# Altium PCB EDR.PcbDoc (part 1 of 2)
Units mm, origin at the board's own origin, x right, y up, seen from the top; angles counter-clockwise.
Board outline 99.5 x 72 mm, 2 copper layers (Top Layer, Bottom Layer); 162 components, 102 nets, 587 pads, 403 vias.
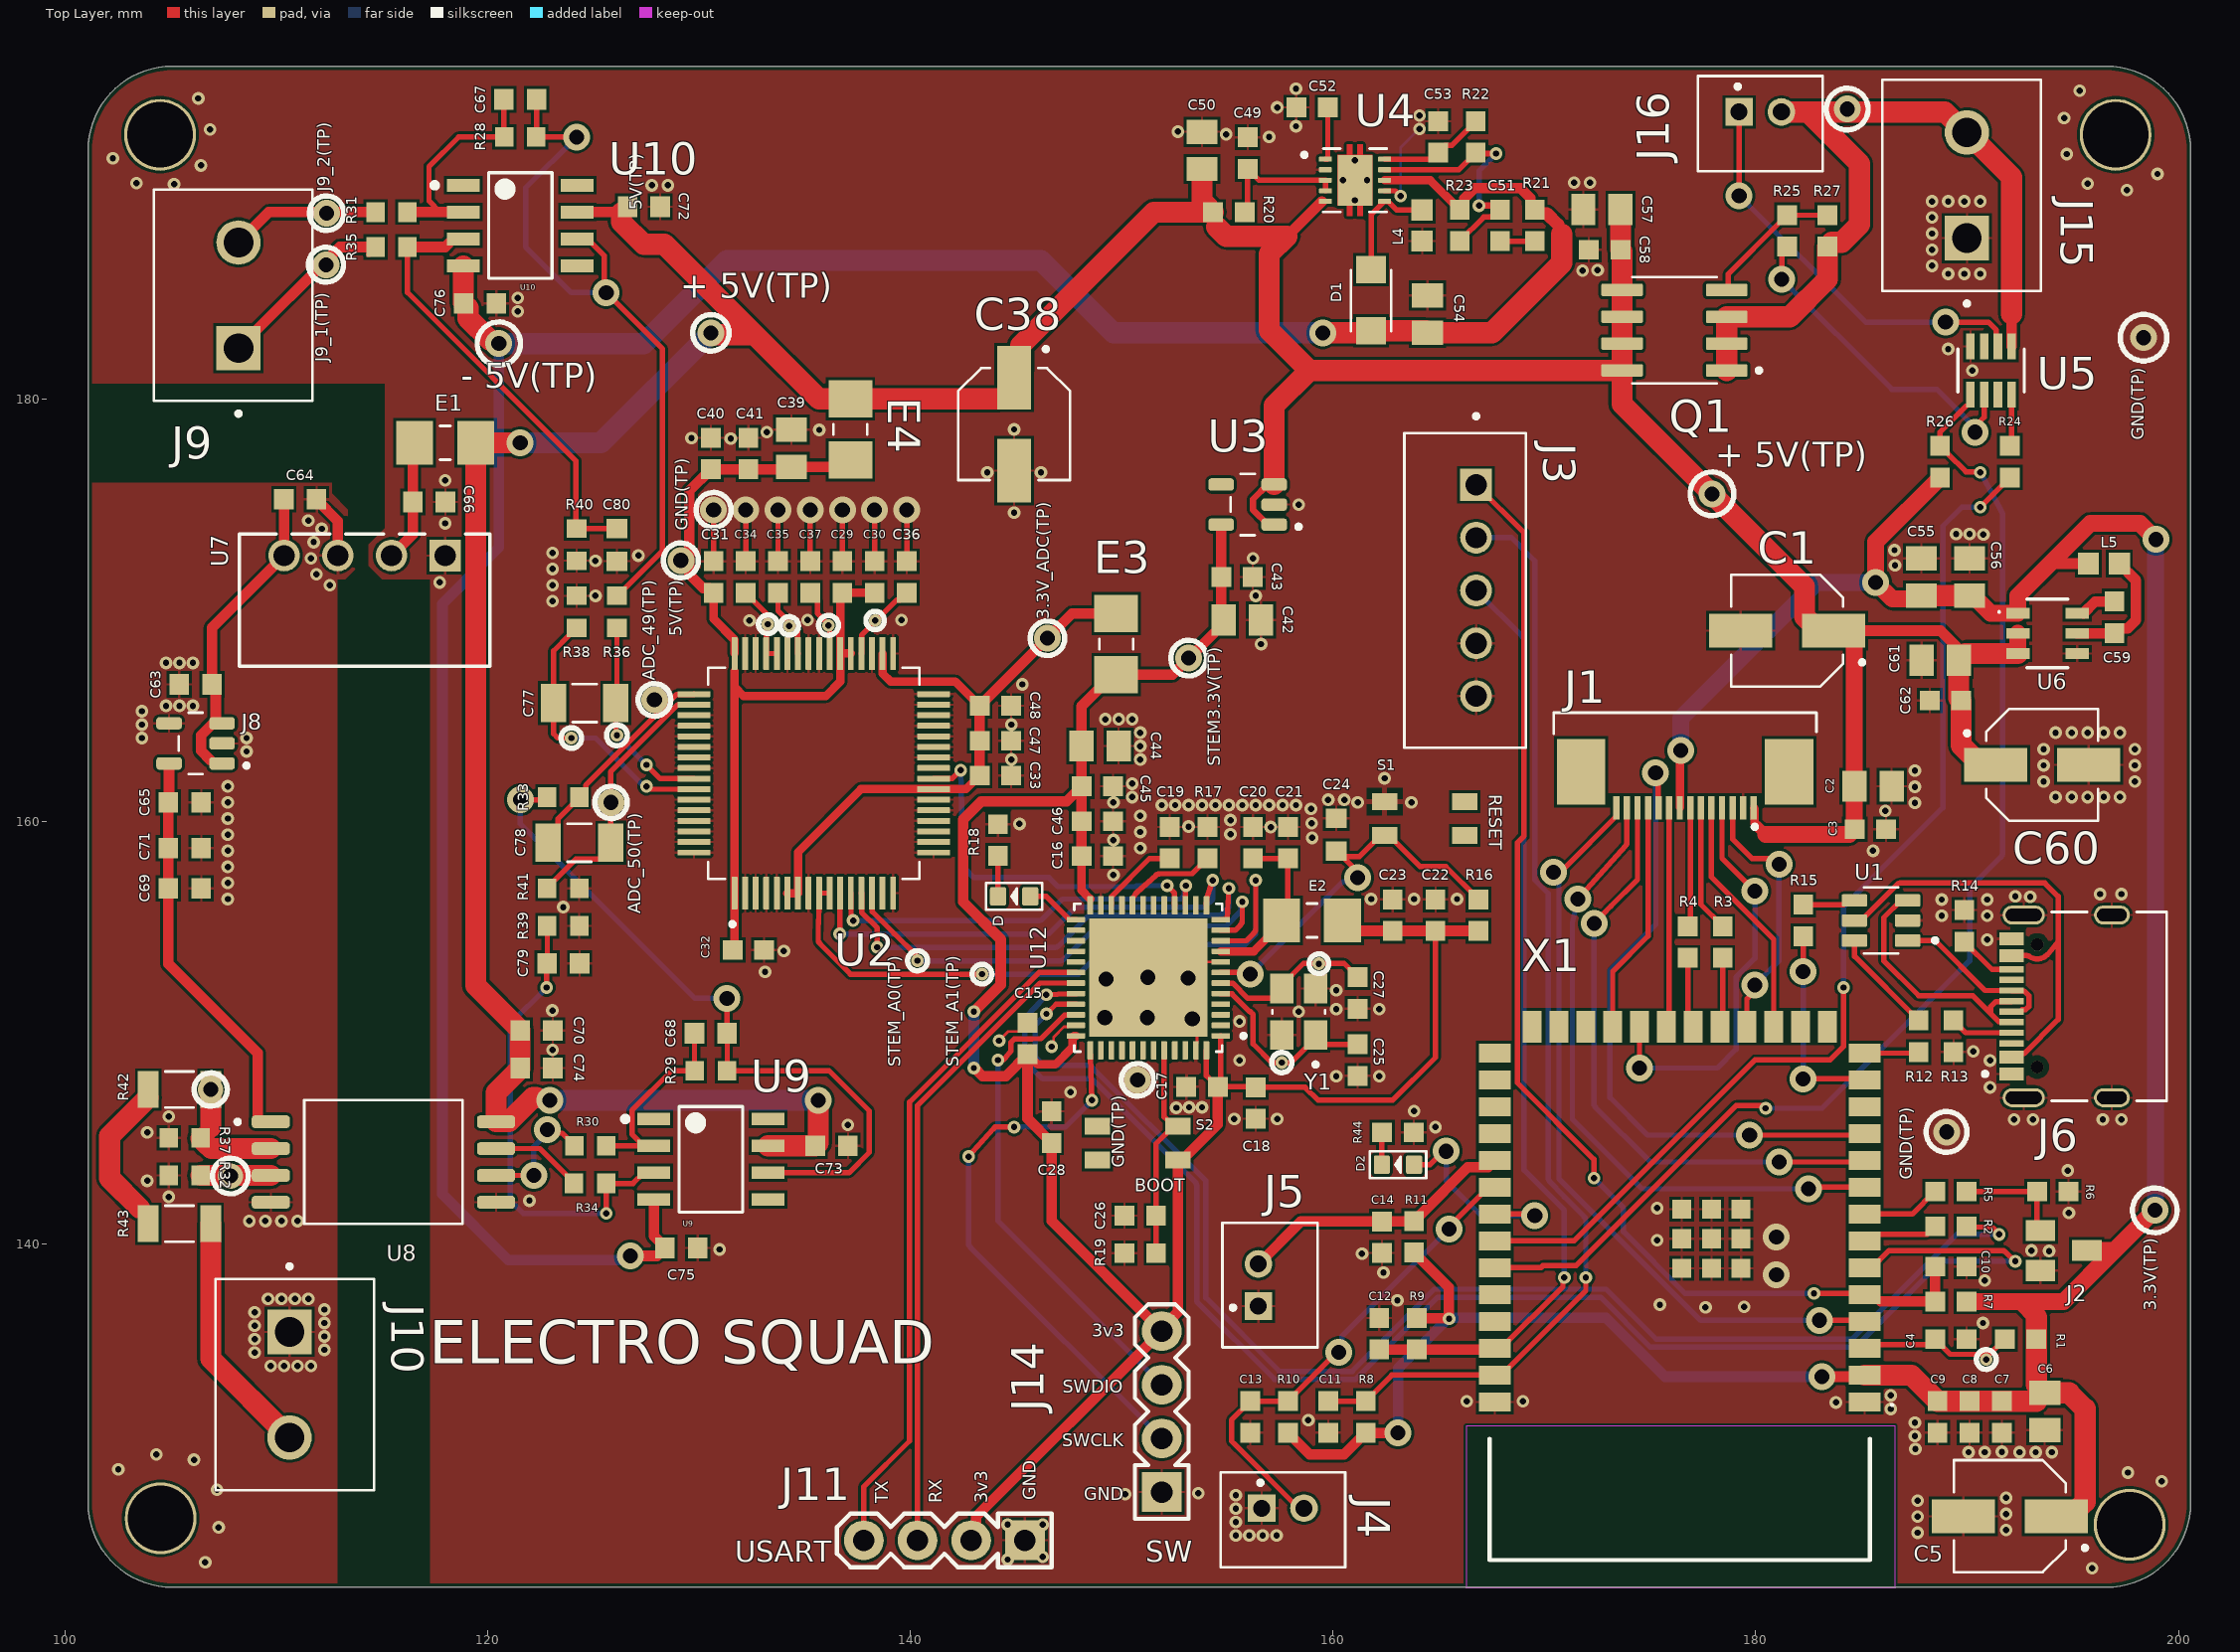
[diagram p0: Top Layer view]
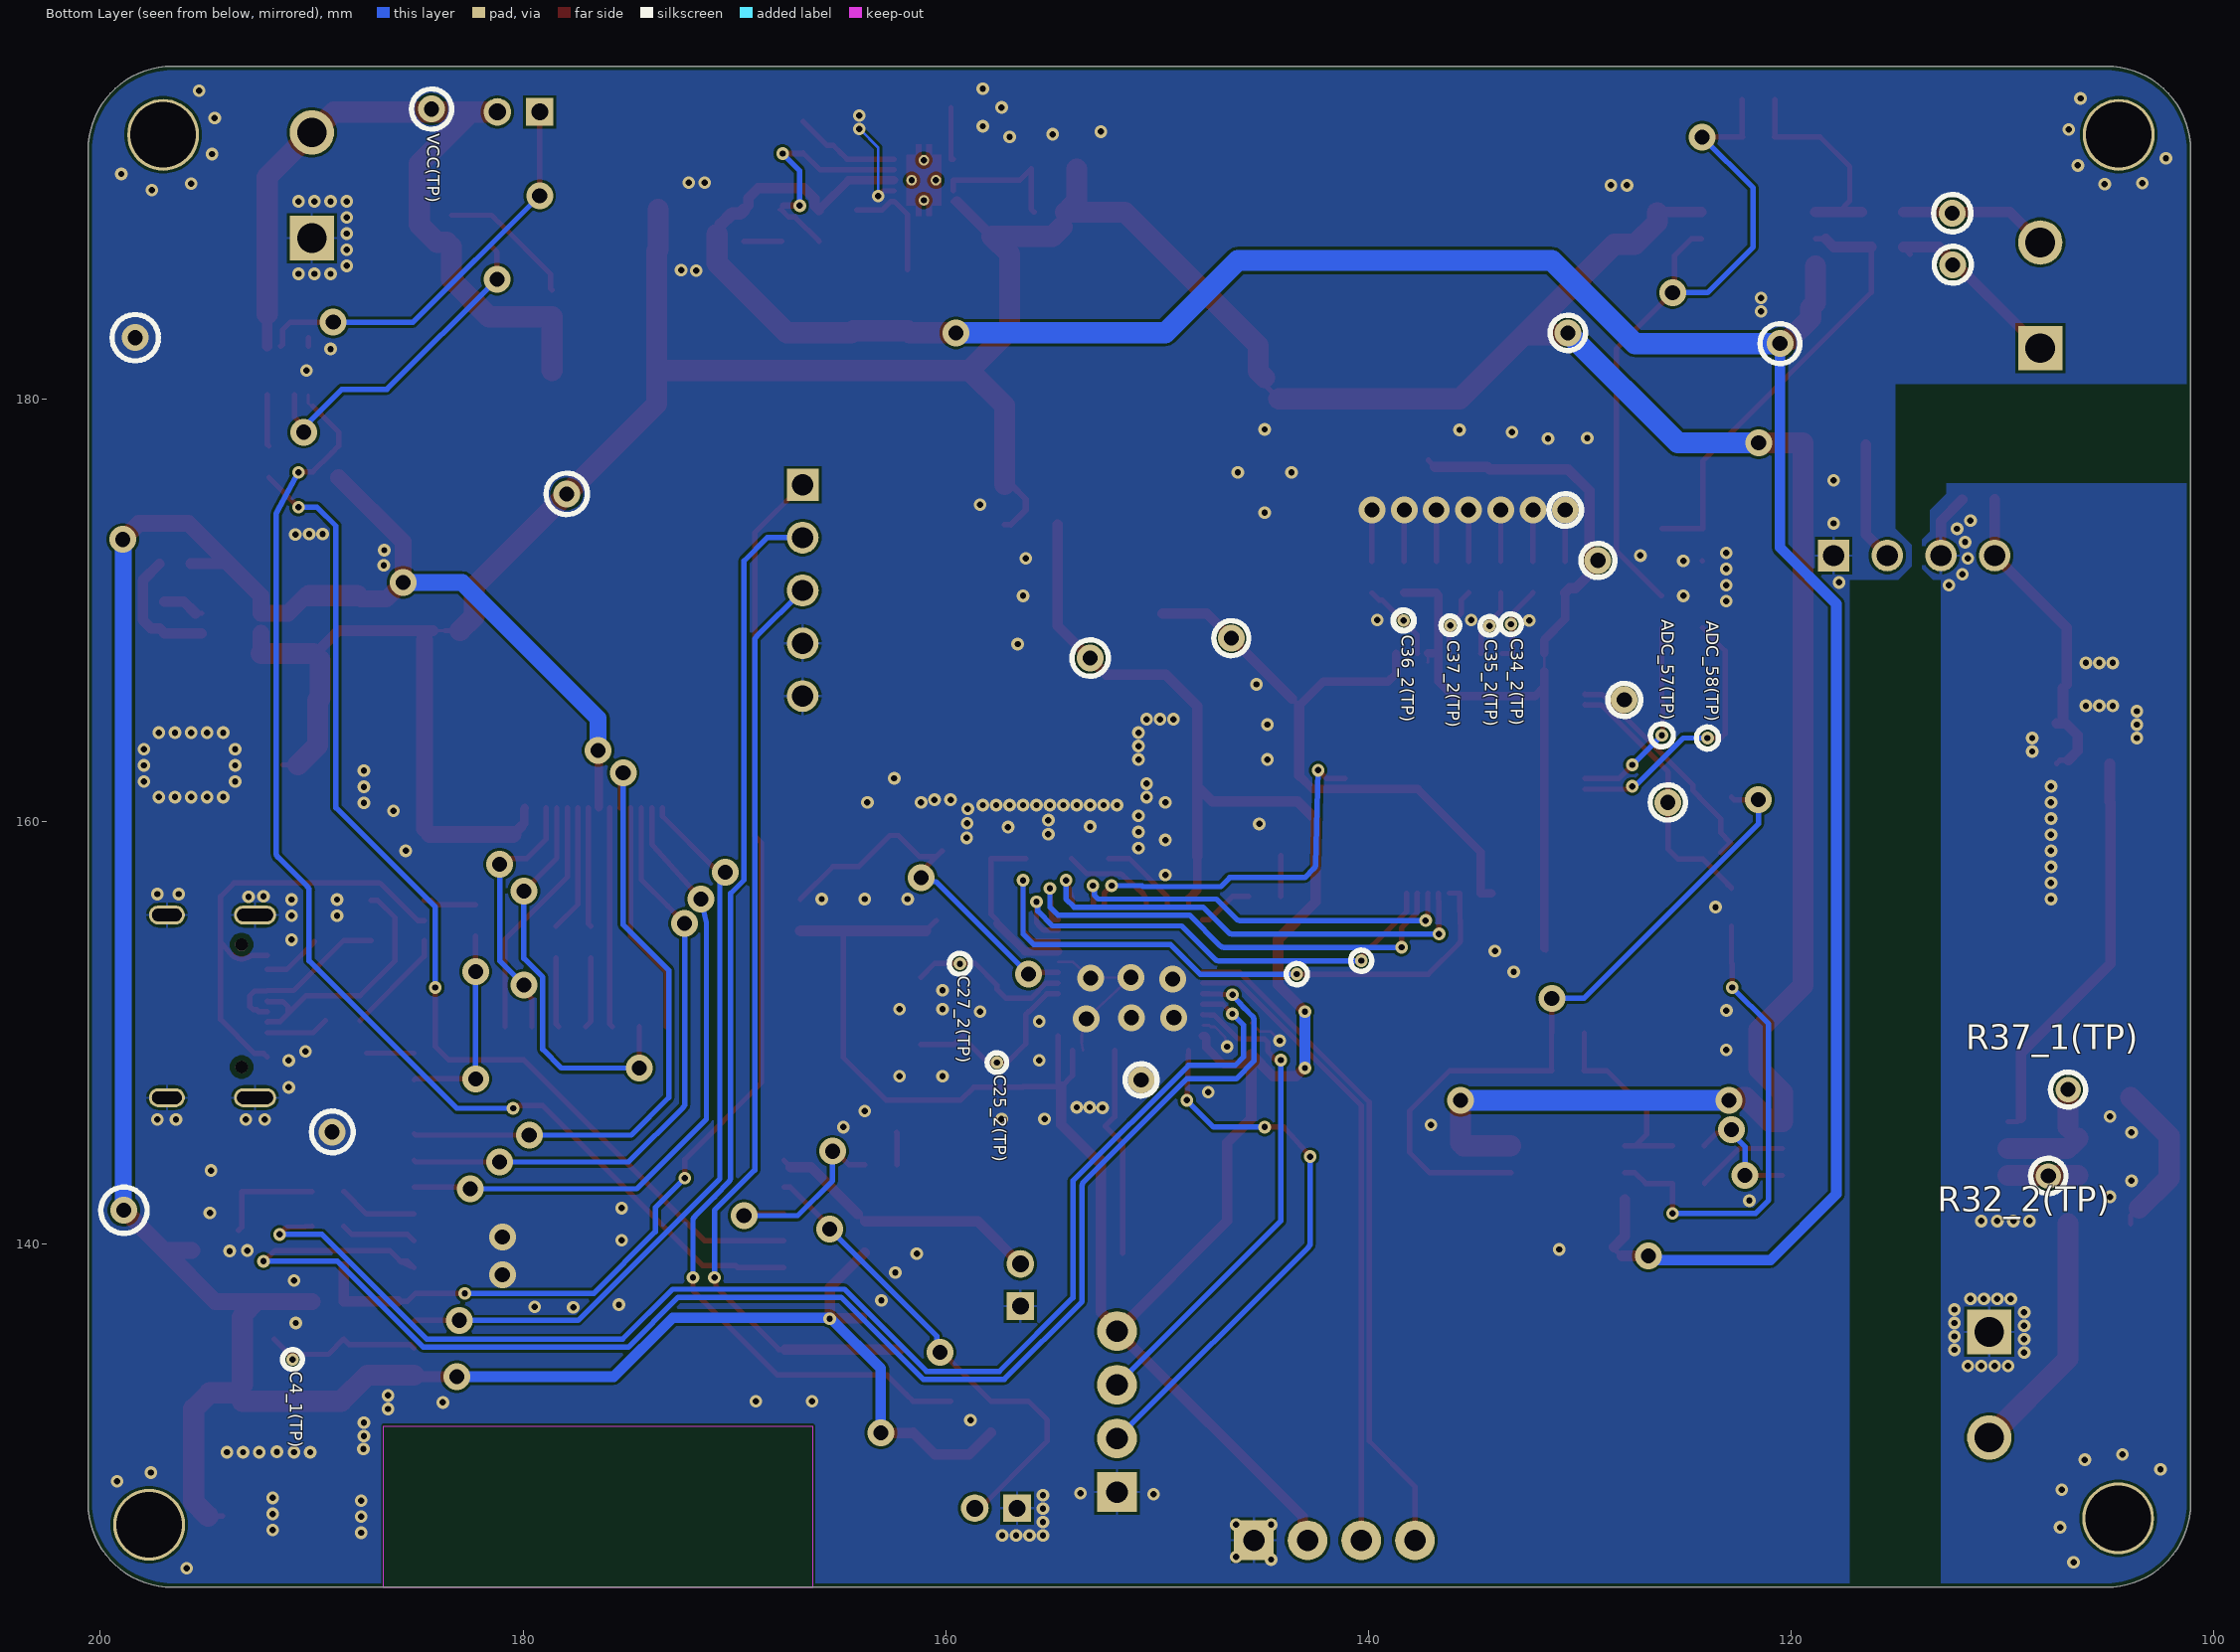
[diagram p1: Bottom Layer view, seen from below]
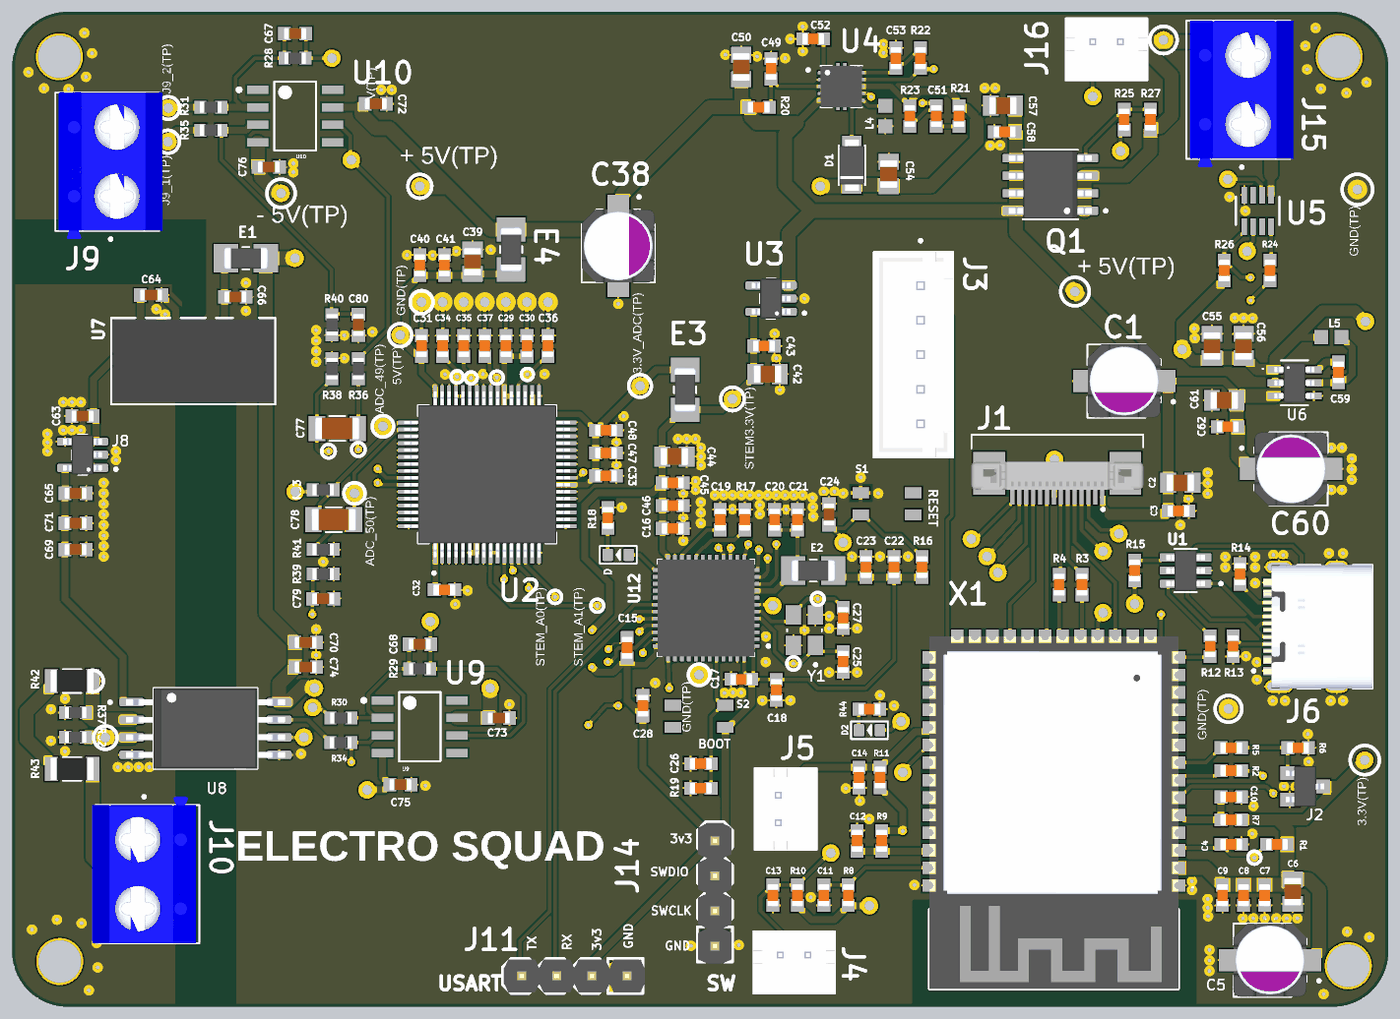
[diagram p3: 3D render of the assembled board from above, using the file's embedded part models]

## Layer stack, top to bottom
Top Solder: solder mask 0.0102, Solder Resist, Dk 3.5
Top Layer: signal copper 0.0356
Dielectric 1: dielectric 0.32, FR-4, Dk 4.8
Bottom Layer: signal copper 0.0356
Bottom Solder: solder mask 0.0102, Solder Resist, Dk 3.5

## Board outline
101.083,127.759 101.083,191.759 cw(c105.083,191.759) 105.083,195.759 196.583,195.759 cw(c196.583,191.759) 200.583,191.759 200.583,127.759 cw(c196.583,127.759) 196.583,123.759 105.083,123.759 cw(c105.083,127.759)

## Design rules (kind name [scope] priority, off if disabled: settings)
AssemblyTestPointUsage [All] p1: allowmultiple=TRUE
AssemblyTestpoint [(IsVia) Or (IsPad And OnMultiLayer)] p1: testpointundercomponent=TRUE minsize=0.5 maxsize=2.54 preferedsize=1.524 minholesize=0 maxholesize=1.016 preferedholesize=0.813 testpointgrid=0.025 usegrid=FALSE gridtolerance=0 allowsidetop=TRUE allowsidebottom=TRUE
BoardOutlineClearance [All] p1: gap=0.2 ignorepadtopadclearanceinfootprint=FALSE
Clearance [All] p1: gap=0.127 ignorepadtopadclearanceinfootprint=FALSE except(0.25: Arc-Hole Track-Hole SMDPad-Hole THPad-Hole Via-Hole Fill-Hole Poly-Hole Region-Hole Text-Hole)
ComponentClearance [All] p1: gap=0.127 collisioncheckmode=3 verticalgap=0.127 showdistances=TRUE
DiffPairsRouting [All] p1: maxlimit=0.254 minlimit=0.127 mostfreqgap=0.127 toplayer_minwidth=0.127 toplayer_maxwidth=25.4 toplayer_prefwidth=0.127 bottomlayer_minwidth=0.127 bottomlayer_maxwidth=25.4 bottomlayer_prefwidth=0.127 maxuncoupledlength=12.7
FabricationTestPointUsage [All] p1: valid=0 allowmultiple=TRUE
FabricationTestpoint [(IsVia) Or (IsPad And OnMultiLayer)] p1: side=3 testpointundercomponent=TRUE minsize=0.5 maxsize=2.54 preferedsize=1.524 minholesize=0 maxholesize=1.016 preferedholesize=0.813 testpointgrid=0.025 allowsidetop=TRUE allowsidebottom=TRUE usegrid=FALSE gridtolerance=0
Height [All] p1: minheight=0 maxheight=1816.048 prefheight=12.7
HoleSize [All] p1: absolutevalues=TRUE maxlimit=6.3 minlimit=0.3 maxpercent=80.000 minpercent=20.000
HoleToHoleClearance [All] p1: gap=0.25 allowstackedmicrovias=FALSE
MinimumAnnularRing [All] p1: minimumring=0.076
MinimumSolderMaskSliver [All] p1: minsoldermaskwidth=0
PlaneClearance [All] p1: clearance=0.127
PlaneConnect PlaneConnectPowerPads [InPadClass('PowerPads')] p1: planeconnectstyle=Direct reliefexpansion=0.508 reliefentries=4 reliefconductorwidth=0.254 reliefairgap=0.254
PlaneConnect [All] p2: pad.planeconnectstyle=Relief pad.reliefexpansion=0.3 pad.reliefentries=4 pad.reliefconductorwidth=0.127 pad.reliefairgap=0.127 via.planeconnectstyle=Direct via.reliefexpansion=0.3 via.reliefentries=4 via.reliefconductorwidth=0.127 via.reliefairgap=0.127
PolygonConnect PolygonConnectPowerPads [All vs (InPadClass('PowerPads'))] p1: connectstyle=Direct reliefconductorwidth=0.254 reliefentries=4 polygonreliefangle="90 Angle" airgapwidth=0.254
PolygonConnect [All] p2: thpad.connectstyle=Relief thpad.reliefconductorwidth=0.127 thpad.reliefentries=4 thpad.polygonreliefangle="90 Angle" thpad.airgapwidth=0.127 smdpad.connectstyle=Relief smdpad.reliefconductorwidth=0.127 smdpad.reliefentries=4 smdpad.polygonreliefangle="90 Angle" smdpad.airgapwidth=0.127 via.connectstyle=Direct via.reliefconductorwidth=0.127 via.reliefentries=4 via.polygonreliefangle="90 Angle" via.airgapwidth=0.127
RoutingVias [All] p1: holewidth=0.3 width=0.6 viastyle="Through Hole" minholewidth=0.3 minwidth=0.6 maxholewidth=0.6 maxwidth=6.6
SilkToSilkClearance [All] p1: silktosilkclearance=0
SilkToSolderMaskClearance [IsPad] p1: minsilkscreentomaskgap=0.127 clearancetoexposedcopper=TRUE
SolderMaskExpansion [All] p1: expansion=0.075 istentingtop=FALSE
Width [All] p1: maxlimit=25.4 minlimit=0.127 preferedwidth=0.127 minimp=50.000000 maximp=50.000000 favimp=50.000000
16 further rules are at their usual default settings.

## Classes and differential pairs
component class U_STM32: C15 C16 C17 C18 C19 C20 C21 C22 C23 C24 C25 C26 C27 C28 D E2 J11 J14 R16 R17 R18 R19 S1 S2 U12 Y1
component class U_Sheet1: C63 C64 C65 C66 C67 C68 C69 C70 C71 C72 C73 C74 C75 C76 C77 C78 C79 C80 E1 J8 J9 J10 R28 R29 R30 R31 R32 R33 R34 R35 R36 R37 R38 R39 R40 R41 R42 R43 U7 U8 U9 U10
component class U_PowerSupply: C38 C39 C40 C41 C42 C43 C44 C45 C46 C47 C48 C49 C50 C51 C52 C53 C54 C55 C56 C57 C58 C59 C60 C61 C62 D1 E3 E4 J15 J16 L4 L5 Q1 R20 R21 R22 R23 R24 R25 R26 R27 U3 U4 U5 U6
component class U_ESP32: C1 C2 C3 C4 C5 C6 C7 C8 C9 C10 C11 C12 C13 C14 D2 J1 J2 J3 J4 J5 J6 R1 R2 R3 R4 R5 R6 R7 R8 R9 R10 R11 R12 R13 R14 R15 R44 U1 X1
component class U_ADS8588: C29 C30 C31 C32 C33 C34 C35 C36 C37 U2

## Components (designator, comment, footprint, x,y, rotation, side; value= is the part's Value field where it differs from the comment)
C1 "100 uF" "100 uF" 181.483,169.037 r180 top
C2 "C2012X7R1H104K085AA" CAPC2012X100N 185.547,161.671 r180 top
C3 "CAP603" CAP603 185.42,159.639 r0 top
C4 "CAP603" CAP603 189.23,135.509 r0 top
C5 "100 uF" "100 uF" 192.024,127.127 r180 top
C6 "C2012X7R1H104K085AA" CAPC2012X100N 193.675,132.08 r90 top
C7 "CAP603" CAP603 191.643,131.826 r90 top
C8 "CAP603" CAP603 190.119,131.826 r90 top
C9 "CAP603" CAP603 188.595,131.826 r90 top
C10 "CAP603" CAP603 189.23,138.938 r0 top
C11 "CAP603" CAP603 159.766,131.826 r270 top
C12 "CAP603" CAP603 162.179,135.763 r90 top
C13 "CAP603" CAP603 156.083,131.826 r90 top
C14 "CAP603" CAP603 162.306,140.335 r90 top
C15 "CAP603" CAP603 145.542,149.733 r90 top
C16 "CAP603" CAP603 148.844,158.369 r0 top
C17 "CAP603" CAP603 153.797,147.447 r180 top
C18 "CAP603" CAP603 156.337,146.685 r270 top
C19 "CAP603" CAP603 152.273,159.004 r90 top
C20 "CAP603" CAP603 156.21,159.004 r270 top
C21 "CAP603" CAP603 157.861,159.004 r270 top
C22 "CAP603" CAP603 164.846,155.575 r270 top
C23 "CAP603" CAP603 162.814,155.575 r270 top
C24 "0.1u" 0603CAPACITOR 160.147,159.385 r270 top
C25 "CAP603" CAP603 161.163,148.717 r90 top
C26 "CAP603" CAP603 150.876,141.351 r0 top
C27 "CAP603" CAP603 161.163,151.892 r90 top
C28 "CAP603" CAP603 146.685,145.542 r90 top
C29 "CAP603" CAP603 136.779,171.577 r90 top
C30 "CAP603" CAP603 138.303,171.577 r90 top
C31 "CAP603" CAP603 130.683,171.577 r90 top
C32 "CAP603" CAP603 132.334,153.924 r0 top
C33 "CAP603" CAP603 144.018,162.179 r0 top
C34 "CAP603" CAP603 132.207,171.577 r270 top
C35 "CAP603" CAP603 133.731,171.577 r270 top
C36 "CAP603" CAP603 139.827,171.577 r270 top
C37 "CAP603" CAP603 135.255,171.577 r270 top
C38 "100 uF" "100 uF" 144.907,178.816 r270 top
C39 "C2012X7R1H104K085AA" CAPC2012X100N 134.366,177.673 r270 top
C40 "CAP603" CAP603 130.556,177.419 r270 top
C41 "CAP603" CAP603 132.334,177.419 r270 top
C42 "C2012X7R1H104K085AA" CAPC2012X100N 155.702,169.545 r180 top
C43 "CAP603" CAP603 155.448,171.577 r180 top
C44 "C2012X7R1H104K085AA" CAPC2012X100N 148.971,163.576 r180 top
C45 "CAP603" CAP603 148.844,161.671 r180 top
C46 "CAP603" CAP603 148.844,160.02 r180 top
C47 "CAP603" CAP603 144.018,163.83 r180 top
C48 "CAP603" CAP603 144.018,165.481 r180 top
C49 "CAP603" CAP603 155.956,191.643 r90 top
C50 "C2012X7R1H104K085AA" CAPC2012X100N 153.797,191.77 r90 top
C51 "CAP603" CAP603 167.894,188.214 r270 top
C52 "CAP603" CAP603 159.004,193.802 r180 top
C53 "CAP603" CAP603 164.973,192.405 r270 top
C54 "C2012X7R1H104K085AA" CAPC2012X100N 164.465,184.023 r270 top
C55 "C2012X7R1H104K085AA" CAPC2012X100N 187.833,171.577 r90 top
C56 "C2012X7R1H104K085AA" CAPC2012X100N 190.119,171.577 r90 top
C57 "C2012X7R1H104K085AA" CAPC2012X100N 172.72,188.976 r0 top
C58 "CAP603" CAP603 172.847,187.071 r0 top
C59 "CAP603" CAP603 196.977,169.672 r90 top
C60 "100 uF" "100 uF" 193.548,162.687 r0 top
C61 "C2012X7R1H104K085AA" CAPC2012X100N 188.722,167.64 r0 top
C62 "CAP603" CAP603 188.976,165.735 r0 top
C63 "1u" 0603CAPACITOR 106.172,166.497 r0 top
C64 "10u" 0603CAPACITOR 111.125,175.26 r0 top
C65 "1u" 0603CAPACITOR 105.664,160.909 r180 top
C66 "4.7u" 0603CAPACITOR 117.221,175.133 r0 top
C67 "1.5n" 0603CAPACITOR 121.539,194.183 r0 top
C68 "2.2n" 0603CAPACITOR 130.556,149.987 r0 top
C69 "0.1u" 0603CAPACITOR 105.664,156.845 r180 top
C70 "1u" 0603CAPACITOR 122.301,150.114 r0 top
C71 "1u" 0603CAPACITOR 105.664,158.75 r180 top
C72 "0.1u" 0603CAPACITOR 127.381,189.103 r0 top
C73 "0.1u" 0603CAPACITOR 136.271,144.653 r0 top
C74 "0.1u" 0603CAPACITOR 122.301,148.336 r0 top
C75 "0.1u" 0603CAPACITOR 129.159,139.827 r0 top
C76 "0.1u" 0603CAPACITOR 119.634,184.531 r0 top
C77 "33n" CAPC1206 124.587,165.608 r0 top locked
C78 "33n" CAPC1206 124.333,159.004 r180 top locked
C79 "2.2n" 0603CAPACITOR 123.571,153.289 r180 top
C80 "1.5n" 0603CAPACITOR 126.111,173.101 r90 top
D "SMD-LED-YELLOW-WHITE(0603)" LED-0603 144.907,156.464 r180 top
D1 "zenor diode" "zenor diode" 161.798,184.658 r270 top locked
D2 "SMD-LED-YELLOW-WHITE(0603)" LED-0603 163.068,143.764 r180 top
E1 "FB" FB_MI1206K601R-10 117.983,177.927 r180 top
E2 "FB" FB_MI1206K601R-10 159.004,155.321 r0 top locked
E3 "FB" FB_MI1206K601R-10 149.733,168.402 r270 top locked
E4 "FB" FB_MI1206K601R-10 137.16,178.562 r90 top locked
J1 "FPC-connector" FPC-connector 176.653,160.655 r180 top
J2 "AO3400" AO3400 194.564,139.7 r270 top
J3 "5-pin jst" "5-pin jst" 166.243,170.942 r90 top locked
J4 "2-pin jst" "2-PIN JST" 157.623,126.958 r180 top
J5 "2-pin jst" "2-PIN JST" 157.014,138.065 r270 top locked
J6 "TYPE-C-31-M-12" TYPE-C-31-M-12 196.85,151.257 r90 top
J8 "TLV70233DBVR" TLV70233 106.172,163.703 r180 top
J9 "KF301-2P" HANDSON_KF301-2P 108.204,184.912 r90 top locked
J10 "KF301-2P" HANDSON_KF301-2P 110.617,133.35 r270 top
J11 "4-pin header" "4-pin header" 142.875,125.984 r180 top locked
J14 "4-pin header" "4-pin header" 151.892,130.81 r90 top locked
J15 "KF301-2P" HANDSON_KF301-2P 189.992,190.119 r90 top
J16 "2-pin jst" "2-PIN JST" 180.213,193.04 r180 top locked
L4 "inductor" inductor 164.211,188.214 r270 top locked
L5 "inductor" inductor 196.469,172.212 r0 top
Q1 "AO4407A" AO4407A 176.149,183.261 r180 top
R1 "RES-603" CAP603 192.532,135.509 r0 top
R2 "RES-603" CAP603 189.23,140.843 r180 top
R3 "RES-603" CAP603 178.435,154.305 r270 top
R4 "RES-603" CAP603 176.784,154.305 r270 top
R5 "RES-603" CAP603 189.23,142.494 r180 top
R6 "RES-603" CAP603 194.056,142.494 r180 top
R7 "RES-603" CAP603 189.23,137.287 r0 top
R8 "RES-603" CAP603 161.544,131.826 r270 top
R9 "RES-603" CAP603 163.957,135.763 r90 top
R10 "RES-603" CAP603 157.861,131.826 r90 top
R11 "RES-603" CAP603 163.83,140.352 r90 top
R12 "RES-603" CAP603 187.706,149.843 r90 top
R13 "RES-603" CAP603 189.357,149.843 r270 top
R14 "RES-603" CAP603 189.865,155.067 r270 top
R15 "RES-603" CAP603 182.245,155.321 r90 top
R16 "RES-603" CAP603 166.878,155.575 r270 top
R17 "RES-603" CAP603 154.051,159.004 r90 top
R18 "RES-603" CAP603 144.145,159.131 r90 top
R19 "RES-603" CAP603 150.876,139.573 r0 top
R20 "RES-603" CAP603 155.067,188.849 r0 top
R21 "RES-603" CAP603 169.545,188.214 r90 top
R22 "RES-603" CAP603 166.751,192.405 r270 top
R23 "RES-603" CAP603 165.989,188.214 r90 top
R24 "RES-603" CAP603 192.024,177.038 r270 top
R25 "RES-603" CAP603 181.483,187.96 r90 top
R26 "RES-603" CAP603 188.722,177.038 r90 top
R27 "RES-603" CAP603 183.388,187.96 r270 top
R28 "33k" 0603RESISTOR 121.539,192.405 r0 top
R29 "22k" 0603RESISTOR 130.556,148.209 r0 top
R30 "10k" 0603RESISTOR 124.848,144.653 r0 top
R31 "10k" 0603RESISTOR 115.443,188.849 r0 top
R32 "1.2k" 0603RESISTOR 105.664,143.256 r0 top
R33 "680R" 0603RESISTOR 123.571,161.163 r0 top
R34 "10k" 0603RESISTOR 124.841,142.875 r0 top
R35 "10k" 0603RESISTOR 115.443,187.198 r0 top
R36 "680R" 0603RESISTOR 126.111,169.933 r270 top
R37 "1.2k" 0603RESISTOR 105.664,145.034 r180 top
R38 "680R" 0603RESISTOR 124.206,169.933 r270 top
R39 "22k" 0603RESISTOR 123.571,155.067 r180 top
R40 "33k" 0603RESISTOR 124.206,173.108 r90 top
R41 "680R" 0603RESISTOR 123.571,156.845 r180 top
R42 "1M" 1M_1206 105.41,147.32 r0 top
R43 "1M" 1M_1206 105.41,140.97 r180 top
R44 "RES-603" CAP603 163.068,145.288 r180 top
S1 "PB" PUSH_BUTTON 164.338,160.147 r0 top
S2 "PB" PUSH_BUTTON 150.749,144.78 r180 top
U1 "USBLC6-2SC6" USBLC6-2SC6 185.928,155.321 r180 top
U2 "ADS8588SIPM" ADS8588SIPM 135.427,162.286 r90 top
U3 "TLV75533PDBVR" TLV75533PDBVR 155.956,175.006 r180 top
U4 "TPS63700DRCR" TPS63700DRCR 161.033,190.357 r0 top
U5 "LTC2954CTS8-1#TRMPBF" LTC2954CTS8-1#TRMPBF 191.135,181.356 r270 top
U6 "AP63203WU-7" AP63203WU-7 193.802,168.91 r0 top
U7 "B0505S-1WR3" B0505S 117.983,172.593 r180 top locked
U8 "AMC1301DWVR" AMC1301 115.062,143.891 r0 top
U9 "OPA197IDR" D0008A-MFG 130.556,144.018 r0 top
U10 "OPA197IDR" D0008A-MFG 121.539,188.214 r0 top
U12 "STM32F411CEU6TR" STM32F411CEU6TR 151.256,152.61 r180 top
X1 "ESP32-S3-WROOM-1-N16R8" ESP32S3WROOM1N8R2 176.403,137.795 r180 top
Y1 "25 MHz oscillator" "25 MHz oscillator" 158.369,151.003 r90 top locked

## Footprints (in the part's own frame and the unit in brackets; to place one, negate y for a bottom-side part, rotate by r counter-clockwise, add the part's x,y. Pads: shape width x height; smd on the part's side, far side on the other; paste and mask are expansions set on the pad)
1M_1206 [mm]
  rect 0.97x1.73 smd paste+0 mask+0.102: 1(-1.48,0) 2(1.48,0)
  silkscreen extent -0.67,-0.85 0.67,0.85, body extent -1.55,-0.8 1.55,0.8, height 0.65
"2-PIN JST" [mm]
  rect 1.308x1.308 / inner round 1.308 / far side rect 1.308x1.308 hole 0.8: 1(1,-0.55)
  round 1.308 hole 0.8: 2(-1,-0.55)
  silkscreen extent -2.95,-2.25 2.95,2.25, body extent -2.95,-2.25 2.95,2.25, height 6
"4-pin header" [mil]
  rect 74x74 / inner round 74 / far side rect 74x74 hole 40 mask+4.02: 1(-100,0)
  round 74 hole 40 mask+4.02: 2(0,0) 3(100,0) 4(200,0)
  silkscreen extent -150,-50 250,50, body extent -155,-47 245,47, height 330
"5-pin jst" [mm]
  rect 1.508x1.508 / inner round 1.508 / far side rect 1.508x1.508 hole 1: 1(5,-0.525)
  round 1.508 hole 1: 2(2.5,-0.525) 3(0,-0.525) 4(-2.5,-0.525) 5(-5,-0.525)
  silkscreen extent -7.45,-2.87 8.35,2.88, body extent -7.45,-2.88 7.45,2.88, height 7
"25 MHz oscillator" [mm]
  rect 1.4x1.1 smd paste+0 mask+0.102: 1(-1.1,-0.8) 2(1.1,-0.8) 3(1.1,0.8) 4(-1.1,0.8)
  silkscreen extent -2.6,-1.25 0.08,1.25
"100 uF" [mm]
  rect 3x1.6 smd: 1(-2.2,0) 2(2.2,0)
  silkscreen extent -3.65,-2.65 2.65,2.65, body extent 0,0 0,0
0603CAPACITOR [mm]
  rect 0.92x0.98 smd: 1(-0.775,0) 2(0.775,0)
  body extent -0.8,-0.41 0.8,0.41, height 0.9
0603RESISTOR [mm]
  rect 0.87x0.93 smd: 1(-0.755,0) 2(0.755,0)
  body extent -0.77,-0.4 0.77,0.4, height 0.6
ADS8588SIPM [mm]
  rrect25% 1.57x0.28 smd: 1(-5.67,3.75) 2(-5.67,3.25) 3(-5.67,2.75) 4(-5.67,2.25) 5(-5.67,1.75) 6(-5.67,1.25) 7(-5.67,0.75) 8(-5.67,0.25) 9(-5.67,-0.25) 10(-5.67,-0.75) 11(-5.67,-1.25) 12(-5.67,-1.75) 13(-5.67,-2.25) 14(-5.67,-2.75) 15(-5.67,-3.25) 16(-5.67,-3.75) 33(5.67,-3.75) 34(5.67,-3.25) 35(5.67,-2.75) 36(5.67,-2.25) 37(5.67,-1.75) 38(5.67,-1.25) 39(5.67,-0.75) 40(5.67,-0.25) 41(5.67,0.25) 42(5.67,0.75) 43(5.67,1.25) 44(5.67,1.75) 45(5.67,2.25) 46(5.67,2.75) 47(5.67,3.25) 48(5.67,3.75)
  rrect25% 0.28x1.57 smd: 17(-3.75,-5.67) 18(-3.25,-5.67) 19(-2.75,-5.67) 20(-2.25,-5.67) 21(-1.75,-5.67) 22(-1.25,-5.67) 23(-0.75,-5.67) 24(-0.25,-5.67) 25(0.25,-5.67) 26(0.75,-5.67) 27(1.25,-5.67) 28(1.75,-5.67) 29(2.25,-5.67) 30(2.75,-5.67) 31(3.25,-5.67) 32(3.75,-5.67) 49(3.75,5.67) 50(3.25,5.67) 51(2.75,5.67) 52(2.25,5.67) 53(1.75,5.67) 54(1.25,5.67) 55(0.75,5.67) 56(0.25,5.67) 57(-0.25,5.67) 58(-0.75,5.67) 59(-1.25,5.67) 60(-1.75,5.67) 61(-2.25,5.67) 62(-2.75,5.67) 63(-3.25,5.67) 64(-3.75,5.67)
  silkscreen extent -7.24,-5 5,5, body extent -6,-6 6,6, height 1.6
AMC1301 [mm]
  rrect50% 1.8x0.6 smd: 1(-5.33,1.905) 2(-5.33,0.635) 3(-5.33,-0.635) 4(-5.33,-1.905) 5(5.33,-1.905) 6(5.33,-0.635) 7(5.33,0.635) 8(5.33,1.905)
  silkscreen extent -7,-2.93 3.75,2.93, body extent -5.75,-2.93 5.75,2.93, height 2.8
AO3400 [mm]
  rect 1x1.4 smd paste+0 mask+0.102: 1(-0.95,-1.1) 2(0.95,-1.1) 3(0,1.1)
  body extent -1.45,-1.4 1.45,1.4, height 1.25
AO4407A [mm]
  rrect25% 1.97x0.6 smd: 1(-2.475,1.905) 2(-2.475,0.635) 3(-2.475,-0.635) 4(-2.475,-1.905) 5(2.475,-1.905) 6(2.475,-0.635) 7(2.475,0.635) 8(2.475,1.905)
  silkscreen extent -4.1,-2.52 2,2.52, body extent -3,-2.45 3,2.45, height 1.75
AP63203WU-7 [mil]
  rect 43.5x20 smd paste+0 mask+4.02: 1(-55.25,37.4) 2(-55.25,0) 3(-55.25,-37.4) 4(55.25,-37.4) 5(55.25,0) 6(55.25,37.4)
  silkscreen extent -91,-64 38,64, body extent -57,-57 57,57, height 39
B0505S [mil]
  rect 59x59 hole 39 paste-99999 mask+0: 1(0,0)
  round 59 hole 39 paste-99999 mask+0: 2(100,0) 3(200,0) 4(300,0)
  silkscreen extent -84,-40 384,206, body extent -79,-35 379,201, height 400
CAP603 [mm]
  rect 0.94x0.93 smd paste+0 mask+0.102: 1(-0.745,0) 2(0.745,0)
  body extent -0.8,-0.4 0.8,0.4, height 0.95
CAPC1206 [mm]
  rect 1.2x1.82 smd paste+0 mask+0.102: 1(-1.475,0) 2(1.475,0)
  silkscreen extent -0.57,-0.9 0.57,0.9, body extent -1.6,-0.8 1.6,0.8, height 1.75
CAPC2012X100N [mm]
  rect 1.15x1.47 smd: 1(-0.88,0) 2(0.88,0)
  body extent -1,-0.63 1,0.63, height 1
D0008A-MFG [mm]
  rect 1.55x0.6 smd paste+0 mask+0: 1(-2.7,1.905) 2(-2.7,0.635) 3(-2.7,-0.635) 4(-2.7,-1.905) 5(2.7,-1.905) 6(2.7,-0.635) 7(2.7,0.635) 8(2.7,1.905)
  silkscreen extent -4.17,-2.5 1.5,2.5
ESP32S3WROOM1N8R2 [mm]
  rect 1.5x0.9 smd: 1(-8.75,5.26) 2(-8.75,3.99) 3(-8.75,2.72) 4(-8.75,1.45) 5(-8.75,0.18) 6(-8.75,-1.09) 7(-8.75,-2.36) 8(-8.75,-3.63) 9(-8.75,-4.9) 10(-8.75,-6.17) 11(-8.75,-7.44) 12(-8.75,-8.71) 13(-8.75,-9.98) 14(-8.75,-11.25) 27(8.75,-11.25) 28(8.75,-9.98) 29(8.75,-8.71) 30(8.75,-7.44) 31(8.75,-6.17) 32(8.75,-4.9) 33(8.75,-3.63) 34(8.75,-2.36) 35(8.75,-1.09) 36(8.75,0.18) 37(8.75,1.45) 38(8.75,2.72) 39(8.75,3.99) 40(8.75,5.26)
  rect 0.9x1.5 smd: 15(-6.985,-12.5) 16(-5.715,-12.5) 17(-4.445,-12.5) 18(-3.175,-12.5) 19(-1.905,-12.5) 20(-0.635,-12.5) 21(0.635,-12.5) 22(1.905,-12.5) 23(3.175,-12.5) 24(4.445,-12.5) 25(5.715,-12.5) 26(6.985,-12.5)
  rect 0.9x0.9 smd: 41(-1.5,-2.46) 42(-1.5,-1.06) 43(-2.9,-1.06) 44(-2.9,-2.46) 45(-2.9,-3.86) 46(-1.5,-3.86) 47(-0.1,-3.86) 48(-0.1,-2.46) 49(-0.1,-1.06)
  silkscreen extent -10.1,5.35 9,12.75, body extent -9,-12.75 9,12.75, height 3.25
FB_MI1206K601R-10 [mm]
  rect 1.76x2.06 smd: 1(-1.445,0) 2(1.445,0)
  silkscreen extent -0.25,-0.8 0.25,0.8, body extent -1.6,-0.8 1.6,0.8, height 1.3
FPC-connector [mm]
  rect 0.3x1.1 smd paste+0 mask+0.102: 1(-3.25,0) 2(-2.75,0) 3(-2.25,0) 4(-1.75,0) 5(-1.25,0) 6(-0.75,0) 7(-0.25,0) 8(0.25,0) 9(0.75,0) 10(1.25,0) 11(1.75,0) 12(2.25,0) 13(2.75,0) 14(3.25,0)
  rect 2.3x3.1 smd paste+0 mask+0.102: P1(-4.92,-1.7) P2(4.92,-1.7)
  silkscreen extent -6.21,-4.5 6.22,1, body extent -6.21,-2.52 6.21,-0.47, height 5.1
HANDSON_KF301-2P [mm]
  rect 2.1x2.1 / inner round 2.1 / far side rect 2.1x2.1 hole 1.4: 1(-2.5,0)
  round 2.1 hole 1.4: 2(2.5,0)
  silkscreen extent -5.7,-3.5 5,4, body extent -5.6,-3.75 5,3.75, height 10
inductor [mm]
  rect 1x1.02 smd: 1(-0.735,0) 2(0.735,0)
LED-0603 [mil]
  rrect25% 30x35 smd: NEG(30,0) POS(-30,0)
  silkscreen extent -52,-25 52,25
LTC2954CTS8-1#TRMPBF [mil]
  rect 48x16 smd: 1(-45,38.39) 2(-45,12.8) 3(-45,-12.8) 4(-45,-38.39) 5(45,-38.39) 6(45,-12.8) 7(45,12.8) 8(45,38.39)
  silkscreen extent -40,-62 40,62
PUSH_BUTTON [mm]
  rect 1.2x0.8 smd paste+0 mask+0.102: 1(-1.9,0.8) 2(1.9,0.8) 3(-1.9,-0.8) 4(1.9,-0.8)
STM32F411CEU6TR [mm]
  rrect25% 0.87x0.27 smd: 1(-3.43,2.75) 2(-3.43,2.25) 3(-3.43,1.75) 4(-3.43,1.25) 5(-3.43,0.75) 6(-3.43,0.25) 7(-3.43,-0.25) 8(-3.43,-0.75) 9(-3.43,-1.25) 10(-3.43,-1.75) 11(-3.43,-2.25) 12(-3.43,-2.75) 25(3.43,-2.75) 26(3.43,-2.25) 27(3.43,-1.75) 28(3.43,-1.25) 29(3.43,-0.75) 30(3.43,-0.25) 31(3.43,0.25) 32(3.43,0.75) 33(3.43,1.25) 34(3.43,1.75) 35(3.43,2.25) 36(3.43,2.75)
  rrect25% 0.27x0.87 smd: 13(-2.75,-3.43) 14(-2.25,-3.43) 15(-1.75,-3.43) 16(-1.25,-3.43) 17(-0.75,-3.43) 18(-0.25,-3.43) 19(0.25,-3.43) 20(0.75,-3.43) 21(1.25,-3.43) 22(1.75,-3.43) 23(2.25,-3.43) 24(2.75,-3.43) 37(2.75,3.43) 38(2.25,3.43) 39(1.75,3.43) 40(1.25,3.43) 41(0.75,3.43) 42(0.25,3.43) 43(-0.25,3.43) 44(-0.75,3.43) 45(-1.25,3.43) 46(-1.75,3.43) 47(-2.25,3.43) 48(-2.75,3.43)
  rect 5.6x5.6 smd paste-4: 49(0,0)
  silkscreen extent -4.6,-3.5 3.5,3.5, body extent -3.5,-3.5 3.5,3.5, height 0.6
TLV70233 [mm]
  rrect50% 1.21x0.59 smd: 1(-1.255,0.95) 2(-1.255,0) 3(-1.255,-0.95) 4(1.255,-0.95) 5(1.255,0.95)
  silkscreen extent -2.51,-1.45 0.8,1.45, body extent -1.4,-1.45 1.4,1.45, height 1.45
TLV75533PDBVR [mm]
  rrect50% 1.21x0.59 smd: 1(-1.255,0.95) 2(-1.255,0) 3(-1.255,-0.95) 4(1.255,-0.95) 5(1.255,0.95)
  silkscreen extent -2.51,-1.45 0.8,1.45, body extent -1.4,-1.45 1.4,1.45, height 1.45
TPS63700DRCR [mm]
  rrect25% 0.6x0.24 smd mask+0: 1(-1.4,1) 2(-1.4,0.5) 3(-1.4,0) 4(-1.4,-0.5) 5(-1.4,-1) 6(1.4,-1) 7(1.4,-0.5) 8(1.4,0) 9(1.4,0.5) 10(1.4,1)
  rrect5% 1.65x2.4 smd paste-2 mask+0: 11(0,0)
  round 0.5 hole 0.3 mask+0: 12(0,-0.95) 13(-0.575,0) 14(0.575,0) 15(0,0.95)
  Top Layer region: 0.375,1.2 0.825,1.2 0.825,-1.2 0.375,-1.2 0.375,-1.7 0.125,-1.7 0.125,-1.2 -0.125,-1.2 -0.125,-1.7 -0.375,-1.7 -0.375,-1.2 -0.825,-1.2 -0.825,1.2 -0.375,1.2 -0.375,1.7 -0.125,1.7 -0.125,1.2 0.125,1.2 0.125,1.7 0.375,1.7
  silkscreen extent -2.49,-1.5 1.5,1.5, body extent -1.5,-1.5 1.5,1.5, height 1
TYPE-C-31-M-12 [mm]
  rect 0.6x1.14 smd mask+0.05: A1_B12(-3.2,4.75) A4_B9(-2.4,4.75) B1_A12(3.2,4.75) B4_A9(2.4,4.75)
  rect 0.3x1.14 smd mask+0.05: A5(-1.25,4.75) A6(-0.25,4.75) A7(0.25,4.75) A8(1.25,4.75) B5(1.75,4.75) B6(0.75,4.75) B7(-0.75,4.75) B8(-1.75,4.75)
  oval 0.9x2 hole 0.6 slot 1.7 at 90 deg: S1(-4.325,4.17) S2(4.325,4.17)
  oval 0.9x1.7 hole 0.6 slot 1.4 at 90 deg: S3(-4.325,0) S4(4.325,0)
  round 0.6 hole 0.6 unplated: ""(-2.87,3.531) ""(2.921,3.531)
  silkscreen extent -4.47,-2.6 4.47,6.1, body extent -4.47,-2.6 4.47,5.31, height 3.31
USBLC6-2SC6 [mm]
  rrect25% 1.21x0.59 smd: 1(-1.255,0.95) 2(-1.255,0) 3(-1.255,-0.95) 4(1.255,-0.95) 5(1.255,0) 6(1.255,0.95)
  silkscreen extent -2.66,-1.56 0.81,1.56, body extent -1.4,-1.46 1.4,1.46, height 1.4
"zenor diode" [mm]
  rect 1.3x1.4 smd: A(1.422,0) C(-1.473,0)
  silkscreen extent -1.45,-0.95 1.45,0.95, body extent -1.85,-0.9 1.85,0.9, height 1.08

## Part data
C1 C5 C38 C60: "Capacitor, Polymer Aluminum, Radial, 12mOhm, 100 CAP, 16V, SVPG, Surface Mount", Package=None, Check_prices=https://www.snapeda.com/parts/16SVPG100M/Panasonic/view-part/?ref=eda, MF=Panasonic, MP=16SVPG100M, SnapEDA_Link=https://www.snapeda.com/parts/16SVPG100M/Panasonic/view-part/?ref=snap
C2 C6 C39 C42 C44 C50 C54 C55 C56 C57 C61: "0.1 ÂµF Â±10% 50V Ceramic Capacitor X7R 0805 (2012 Metric)", Package="2012 TDK", Check_prices=https://www.snapeda.com/parts/C2012X7R1H104K085AA/TDK/view-part/?ref=eda, Digi-Key_Part_Number=445-7534-1-ND, MF=TDK, MP=C2012X7R1H104K085AA, Purchase-URL=https://pricing.snapeda.com/search/part/C2012X7R1H104K085AA/?ref=eda, SnapEDA_Link=https://www.snapeda.com/parts/C2012X7R1H104K085AA/TDK/view-part/?ref=snap
C3 C4 C7 C8 C9 C10 C11 C12 C13 C14 C15 C16 C17 C18 C19 C20 C21 C22 C23 C25 C26 C27 C28 C29 C30 C31 C32 C33 C34 C35 C36 C37 C40 C41 C43 C45 C46 C47 C48 C49 C51 C52 C53 C58 C59 C62: "0.1 ÂµF Â±5% 10V Ceramic Capacitor X7R 0603 (1608 Metric)", Package="0603-2 VISHAY", Check_prices=https://www.snapeda.com/parts/VJ0603Y104JXQCW1BC/Vishay/view-part/?ref=eda, MF=Vishay, MP=VJ0603Y104JXQCW1BC, SnapEDA_Link=https://www.snapeda.com/parts/VJ0603Y104JXQCW1BC/Vishay/view-part/?ref=snap
C24 C69 C72 C73 C74 C75 C76: library part 0603_0.1u, "100nf,X7R,50V", Package="1608 AVX", Check_prices=https://www.snapeda.com/parts/0603YC223KAT2A/AVX/view-part/?ref=eda, MF=AVX, MP=0603YC223KAT2A, SnapEDA_Link=https://www.snapeda.com/parts/0603YC223KAT2A/AVX/view-part/?ref=snap
C63 C65 C70 C71: library part 0603_1u, "1uF,X7R,50V", Package="1608 AVX", Check_prices=https://www.snapeda.com/parts/0603YC223KAT2A/AVX/view-part/?ref=eda, MF=AVX, MP=0603YC223KAT2A, SnapEDA_Link=https://www.snapeda.com/parts/0603YC223KAT2A/AVX/view-part/?ref=snap
C64: library part 0603_10u, "10uF,X7R,50V", Package="1608 AVX", Check_prices=https://www.snapeda.com/parts/0603YC223KAT2A/AVX/view-part/?ref=eda, MF=AVX, MP=0603YC223KAT2A, SnapEDA_Link=https://www.snapeda.com/parts/0603YC223KAT2A/AVX/view-part/?ref=snap
C66: library part 0603_4.7u, "4.7uF,X7R,50V", Package="1608 AVX", Check_prices=https://www.snapeda.com/parts/0603YC223KAT2A/AVX/view-part/?ref=eda, MF=AVX, MP=0603YC223KAT2A, SnapEDA_Link=https://www.snapeda.com/parts/0603YC223KAT2A/AVX/view-part/?ref=snap
C67 C80: library part 0603_1.5nf, "1.5nf_C0G_50V", Package="1608 AVX", Check_prices=https://www.snapeda.com/parts/0603YC223KAT2A/AVX/view-part/?ref=eda, MF=AVX, MP=0603YC223KAT2A, SnapEDA_Link=https://www.snapeda.com/parts/0603YC223KAT2A/AVX/view-part/?ref=snap
C68 C79: library part 0603_2.2n, "2.2nF,C0G,50V", Package="1608 AVX", Check_prices=https://www.snapeda.com/parts/0603YC223KAT2A/AVX/view-part/?ref=eda, MF=AVX, MP=0603YC223KAT2A, SnapEDA_Link=https://www.snapeda.com/parts/0603YC223KAT2A/AVX/view-part/?ref=snap
C77 C78: library part 0603_33n, "33nf_C0G_50V", Package="1608 AVX", Check_prices=https://www.snapeda.com/parts/0603YC223KAT2A/AVX/view-part/?ref=eda, MF=AVX, MP=0603YC223KAT2A, SnapEDA_Link=https://www.snapeda.com/parts/0603YC223KAT2A/AVX/view-part/?ref=snap
D D2: "SMD LED Yellow-White", Package=None, Availability=Unavailable, MF=Chengguangxing, MP=ADL-0603W, Price=None, SnapEDA_Link=https://www.snapeda.com/parts/ADL-0603W/Chengguangxing/view-part/106378/?ref=snap
D1: "DO-214AC (SMA), 1250mW, 5%, Zener Diode", Package="SMA-2 Taiwan Semiconductor", Check_prices=https://www.snapeda.com/parts/1SMA4746H/taiwan/view-part/?ref=eda, MF="Taiwan Semiconductor", MP=1SMA4746H, SnapEDA_Link=https://www.snapeda.com/parts/1SMA4746H/taiwan/view-part/?ref=snap
E1 E2 E3 E4: library part MI1206K601R-10, "600 Ohms @ 100 MHz 1 Power, Signal Line Ferrite Bead 1206 (3216 Metric) 1.5A 80mOhm", Package="1206 Laird", Check_prices=https://www.snapeda.com/parts/MI1206K601R-10/Laird-Signal+Integrity+Products/view-part/?ref=eda, MF="Laird-Signal Integrity", MP=MI1206K601R-10, SnapEDA_Link=https://www.snapeda.com/parts/MI1206K601R-10/Laird-Signal+Integrity+Products/view-part/?ref=snap
J1: "14 Position FPC Connector Contacts, Top 0.020 (0.50mm) Surface Mount, Right Angle", Package=None, Check_prices=https://www.snapeda.com/parts/1-1734839-4/TE+Connectivity+AMP+Connectors/view-part/?ref=eda, EU_RoHS_Compliance=Compliant, MF="TE Connectivity", MP=1-1734839-4, SnapEDA_Link=https://www.snapeda.com/parts/1-1734839-4/TE+Connectivity+AMP+Connectors/view-part/?ref=snap
J2: "N-Channel 30 V 5.8A (Ta) 1.4W (Ta) Surface Mount SOT-23-3", Package="SOT-23-3 Alpha &amp; Omega Semiconductor", Check_prices=https://www.snapeda.com/parts/AO3400/Alpha/view-part/?ref=eda, MF="Alpha &", MP=AO3400, SnapEDA_Link=https://www.snapeda.com/parts/AO3400/Alpha/view-part/?ref=snap
J3: "Connector Header Through Hole 5 position 0.098 (2.50mm)", Package=None, Check_prices=https://www.snapeda.com/parts/B5B-XH-A(LF)(SN)/JST+Sales+America+Inc./view-part/?ref=eda, MF="JST Sales America Inc.", MP=B5B-XH-A(LF)(SN), SnapEDA_Link=https://www.snapeda.com/parts/B5B-XH-A(LF)(SN)/JST+Sales+America+Inc./view-part/?ref=snap
J4 J5 J16: "Connector Header Through Hole 2 position 0.079 (2.00mm)", Package=None, Check_prices=https://www.snapeda.com/parts/B2B-PH-K-S/JST/view-part/?ref=eda, MF="JST Sales America Inc.", MP=B2B-PH-K-S, SnapEDA_Link=https://www.snapeda.com/parts/B2B-PH-K-S/JST/view-part/?ref=snap
J6: "USB Connectors 24 Receptacle 1 8.94*7.3mm RoHS", Package=Package, Check_prices=https://www.snapeda.com/parts/TYPE-C-31-M-12/HRO+Electronics+Co.%252C+Ltd./view-part/?ref=eda, MF="HRO Electronics Co., Ltd.", MP=TYPE-C-31-M-12, SnapEDA_Link=https://www.snapeda.com/parts/TYPE-C-31-M-12/HRO+Electronics+Co.%252C+Ltd./view-part/?ref=snap
J8: "300-mA, high-PSRR, low-IQ, low-dropout voltage regulator with enable", Package="SOT-23-5 Texas Instruments", Check_prices=https://www.snapeda.com/parts/TLV70233DBVR/Texas+Instruments/view-part/?ref=eda, MF="Texas Instruments", MP=TLV70233DBVR, SnapEDA_Link=https://www.snapeda.com/parts/TLV70233DBVR/Texas+Instruments/view-part/?ref=snap
J9 J10 J15: "2 Pin Terminal Block 5mm Pitch", Package=None, Check_prices=https://www.snapeda.com/parts/KF301-2P/Handson+Technology/view-part/?ref=eda, MF="Handson Technology", MP=KF301-2P, SnapEDA_Link=https://www.snapeda.com/parts/KF301-2P/Handson+Technology/view-part/?ref=snap
J11 J14: "BergStikÂ®, Board to Board connector, Unshrouded Header, Through Hole, Single Row, 4 Positions, 2.54 mm Pitch, Vertical, 5.84 mm (0.23 in.) Mating, 2.41 mm (0.095 in.) Tail", Package=None, Check_prices=https://www.snapeda.com/parts/68000-104HLF/Amphenol+FCI/view-part/?ref=eda, MF=FCI, MP=68000-104HLF, SnapEDA_Link=https://www.snapeda.com/parts/68000-104HLF/Amphenol+FCI/view-part/?ref=snap
L4 L5: "Inductor with Inductance: 4.7uH Tol. +/-20%, Package: 0603 _1608_", Package="1608 Murata", Availability=Unavailable, MF="Murata Electronics", MP=LQM18PN4R7MFRL, Price=None, SnapEDA_Link=https://www.snapeda.com/parts/LQM18PN4R7MFRL/Murata%20Electronics%20North%20America/view-part/1499515/?ref=snap
Q1: "P-Channel 30 V 12A (Ta) 3.1W (Ta) Surface Mount 8-SOIC", Package="SOIC-8 Alpha &amp; Omega Semiconductor", Check_prices=https://www.snapeda.com/parts/AO4407A/Alpha/view-part/?ref=eda, MF="Alpha &", MP=AO4407A, SnapEDA_Link=https://www.snapeda.com/parts/AO4407A/Alpha/view-part/?ref=snap
R1 R2 R3 R4 R5 R6 R7 R8 R9 R10 R11 R12 R13 R14 R15 R16 R17 R18 R19 R20 R21 R22 R23 R24 R25 R26 R27 R44: Package="2012 Rohm Semiconductor", Availability="In Stock", Check_prices=https://www.snapeda.com/parts/RC0805FR-0710KL/Yageo/view-part/?ref=eda, MF=Yageo, MP=RC0805FR-0710KL, Price=None, Purchase-URL=https://pricing.snapeda.com/search/part/RC0805FR-0710KL/?ref=eda, SnapEDA_Link=https://www.snapeda.com/parts/RC0805FR-0710KL/Yageo/view-part/?ref=snap
R28 R40: library part 0603_33k_1, "33kOhm", Package="1508 Bourns", Check_prices=https://www.snapeda.com/parts/CRT0603-FY-1000ELF/Bourns/view-part/?ref=eda, Digi-Key_Part_Number=118-CRT0603-FY-1000ELFTR-ND, MF=Bourns, MP=CRT0603-FY-1000ELF, Purchase-URL=https://pricing.snapeda.com/search/part/CRT0603-FY-1000ELF/?ref=eda, SnapEDA_Link=https://www.snapeda.com/parts/CRT0603-FY-1000ELF/Bourns/view-part/?ref=snap
R29 R39: library part 0603_22k, "22kOhm_0.1% to 0.5%", Package="1508 Bourns", Check_prices=https://www.snapeda.com/parts/CRT0603-FY-1000ELF/Bourns/view-part/?ref=eda, Digi-Key_Part_Number=118-CRT0603-FY-1000ELFTR-ND, MF=Bourns, MP=CRT0603-FY-1000ELF, Purchase-URL=https://pricing.snapeda.com/search/part/CRT0603-FY-1000ELF/?ref=eda, SnapEDA_Link=https://www.snapeda.com/parts/CRT0603-FY-1000ELF/Bourns/view-part/?ref=snap
R30 R31 R34 R35: library part 0603_10k, "10kOhm", Package="1508 Bourns", Check_prices=https://www.snapeda.com/parts/CRT0603-FY-1000ELF/Bourns/view-part/?ref=eda, Digi-Key_Part_Number=118-CRT0603-FY-1000ELFTR-ND, MF=Bourns, MP=CRT0603-FY-1000ELF, Purchase-URL=https://pricing.snapeda.com/search/part/CRT0603-FY-1000ELF/?ref=eda, SnapEDA_Link=https://www.snapeda.com/parts/CRT0603-FY-1000ELF/Bourns/view-part/?ref=snap
R32 R37: library part 0603_1.2K, "1.2k (0.1%-0.5%)", Package="1508 Bourns", Check_prices=https://www.snapeda.com/parts/CRT0603-FY-1000ELF/Bourns/view-part/?ref=eda, Digi-Key_Part_Number=118-CRT0603-FY-1000ELFTR-ND, MF=Bourns, MP=CRT0603-FY-1000ELF, Purchase-URL=https://pricing.snapeda.com/search/part/CRT0603-FY-1000ELF/?ref=eda, SnapEDA_Link=https://www.snapeda.com/parts/CRT0603-FY-1000ELF/Bourns/view-part/?ref=snap
R33 R36 R38 R41: library part 0603_680Ohm, "680Ohm-0.1%", Package="1508 Bourns", Check_prices=https://www.snapeda.com/parts/CRT0603-FY-1000ELF/Bourns/view-part/?ref=eda, Digi-Key_Part_Number=118-CRT0603-FY-1000ELFTR-ND, MF=Bourns, MP=CRT0603-FY-1000ELF, Purchase-URL=https://pricing.snapeda.com/search/part/CRT0603-FY-1000ELF/?ref=eda, SnapEDA_Link=https://www.snapeda.com/parts/CRT0603-FY-1000ELF/Bourns/view-part/?ref=snap
R42 R43: library part 1206-1M, "1M Ohms Â±1% 0.25W, 1/4W Chip Resistor 1206 (3216 Metric) Moisture Resistant Thick Film", Package="3116 Yageo", Check_prices=https://www.snapeda.com/parts/RC1206JR-0713RL/Yageo/view-part/?ref=eda, MF=Yageo, MP=RC1206JR-0713RL, SnapEDA_Link=https://www.snapeda.com/parts/RC1206JR-0713RL/Yageo/view-part/?ref=snap
S1 S2: library part PushButton
U1: "17V Clamp 5A (8/20Âµs) Ipp Tvs Diode Surface Mount SOT-23-6", Package="SOT-23-6 STMicroelectronics", Availability="In Stock", Check_prices=https://www.snapeda.com/parts/USBLC6-2SC6/STMicroelectronics/view-part/?ref=eda, MF=STMicroelectronics, MP=USBLC6-2SC6, Price=None, Purchase-URL=https://pricing.snapeda.com/search/part/USBLC6-2SC6/?ref=eda, SnapEDA_Link=https://www.snapeda.com/parts/USBLC6-2SC6/STMicroelectronics/view-part/?ref=snap
U2: "16-Bit High-Speed 8-Channel Simultaneous-Sampling ADC With Bipolar Inputs on a Single Supply 64-LQFP -40 to 125", Package="LQFP-64 Texas Instruments", Availability="In Stock", Check_prices=https://www.snapeda.com/parts/ADS8588SIPM/Texas+Instruments/view-part/?ref=eda, MF="Texas Instruments", MP=ADS8588SIPM, Price=None, Purchase-URL=https://pricing.snapeda.com/search/part/ADS8588SIPM/?ref=eda, SnapEDA_Link=https://www.snapeda.com/parts/ADS8588SIPM/Texas+Instruments/view-part/?ref=snap
U3: "500-mA High-PSRR Low-IQ-Tief-Dropout-Spannungsregler mitablem", Package="SOT-23-5 Texas Instruments", Check_prices=https://www.snapeda.com/parts/TLV75533PDBVR/Texas+Instruments/view-part/?ref=eda, MF="Texas Instruments", MP=TLV75533PDBVR, SnapEDA_Link=https://www.snapeda.com/parts/TLV75533PDBVR/Texas+Instruments/view-part/?ref=snap
U4: "Adjustable, -15V Output Inverting DC/DC Converter in 3x3 QFN", Package="VSON-10 Texas Instruments", Check_prices=https://www.snapeda.com/parts/TPS63700DRCR/Texas+Instruments/view-part/?ref=eda, MF="Texas Instruments", MP=TPS63700DRCR, SnapEDA_Link=https://www.snapeda.com/parts/TPS63700DRCR/Texas+Instruments/view-part/?ref=snap
U5: Package=None, Availability=Unavailable, MF="{'manufacturer': u'Analog Devices Inc.'}", MP=LTC2954CTS8-1#TRMPBF, Price=None
U6: "Buck Switching Regulator IC Positive Fixed 3.3V 1 Output 2A SOT-23-6 Thin, TSOT-23-6", Package="SOT-23-6 Diodes Incorporated", Check_prices=https://www.snapeda.com/parts/AP63203WU-7/Diodes+Inc./view-part/?ref=eda, MF="Diodes Zetex", MP=AP63203WU-7, SnapEDA_Link=https://www.snapeda.com/parts/AP63203WU-7/Diodes+Inc./view-part/?ref=snap
U7: "Description", Manufacturer_Name=MORNSUN, Copyright="Copyright (C) 2026 Ultra Librarian. All rights reserved.", Manufacturer_Part_Number=B0505S-1WR3, RefDes=RefDes, Type="DC DC Converters"
U8: "250 mV-Input Precision Reinforced Isolated Amplifier for Current Sensing 8-SOIC -40 to 125", Package="SOIC-8 Texas Instruments", Availability="In Stock", Check_prices=https://www.snapeda.com/parts/AMC1301DWVR/Texas+Instruments/view-part/?ref=eda, MF="Texas Instruments", MP=AMC1301DWVR, Price=None, Purchase-URL=https://pricing.snapeda.com/search/part/AMC1301DWVR/?ref=eda, SnapEDA_Link=https://www.snapeda.com/parts/AMC1301DWVR/Texas+Instruments/view-part/?ref=snap
U9 U10: "Single, 36-V, precision, rail-to-rail input output, low offset voltage op amp 8-SOIC -40 to 125", Manufacturer_Name="Texas Instruments", Copyright="Copyright (C) 2026 Ultra Librarian. All rights reserved.", Manufacturer_Part_Number=OPA197IDR, RefDes=RefDes, Type=TYPE
U12: "ARMÂ® CortexÂ®-M4 series Microcontroller IC 32-Bit Single-Core 100MHz 512KB (512K x 8) FLASH 48-UFQFPN (7x7)", Package="UFQFN-48 STMicroelectronics", Availability="In Stock", Check_prices=https://www.snapeda.com/parts/STM32F411CEU6TR/STMicroelectronics/view-part/?ref=eda, MF=STMicroelectronics, MP=STM32F411CEU6TR, Price=None, Purchase-URL=https://pricing.snapeda.com/search/part/STM32F411CEU6TR/?ref=eda, SnapEDA_Link=https://www.snapeda.com/parts/STM32F411CEU6TR/STMicroelectronics/view-part/?ref=snap
X1: "Bluetooth, WiFi 802.11b/g/n, Bluetooth v5.0 Transceiver Module 2.4GHz PCB Trace Surface Mount", Package="NON STANDARD Espressif Systems", Check_prices=https://www.snapeda.com/parts/ESP32-S3-WROOM-1-N16R8/Espressif+Systems/view-part/?ref=eda, MF="Espressif Systems", MP=ESP32-S3-WROOM-1-N16R8, SnapEDA_Link=https://www.snapeda.com/parts/ESP32-S3-WROOM-1-N16R8/Espressif+Systems/view-part/?ref=snap
Y1: "25 MHz 10ppm Crystal 18pF 30 Ohms 4-SMD, No Lead (3.20mm x 2.50mm)", Package=None, Check_prices=https://www.snapeda.com/parts/RH100-25.000-18-F-1015-TR-NS2/Raltron+Electronics/view-part/?ref=eda, MF="Raltron Electronics", MP=RH100-25.000-18-F-1015-TR-NS2, SnapEDA_Link=https://www.snapeda.com/parts/RH100-25.000-18-F-1015-TR-NS2/Raltron+Electronics/view-part/?ref=snap

## Free pads (board coordinates)
  round 3.4 hole 3.1: 3(104.496,192.507) 3(104.521,127.025) 3(197.028,192.507) 3(197.688,126.721)

## Via types
v1: diameter 0.6, hole 0.3, Top Layer to Bottom Layer, 331 vias
v2: diameter 1.27, hole 0.711, Top Layer to Bottom Layer, 70 vias
v3: diameter 1.2, hole 0.711, Top Layer to Bottom Layer, 2 vias

## Nets (pads, with @x,y where several pads share a name; then routed paths per layer and width w, separated by ;. In a path a pad name is that pad's centre, name@x,y a point inside that pad or via, vN(x,y) a via of type N, cw(c..) or ccw(c..) an arc to the next point about the centre after c; other vN are vias at no path point)
3.3V: C5.1 C6.2 C7.2 C8.2 C9.2 C55.1 C56.1 J1.8 J2.3 L5.1 R1.2 R7.2 R8.2 R9.2 R10.1 R11.1 R26.1 U6.1 X1.2 | length 145.2
  Top Layer w0.127: X1.2@185.079,133.731 X1.2@185.153,133.805
  Top Layer w0.254: R10.1@157.861,131.076 R10.1@157.861,131.081 ; R8.2@161.544,131.076 R8.2@161.544,131.081 R8.2@161.561,131.064 ; R11.1@163.83,139.602 R11.1@163.83,139.607 ; R9.2@163.957,136.508 R9.2@163.974,136.525 ; J1.8@176.403,160.655 J1.8@176.424,160.676 ; v2@176.424,163.343 v2(176.445,163.364) ; C55.1@187.669,170.533 C55.1@187.833,170.697 ; C9.2@188.595,132.571 C9.2@188.595,132.576 ; R26.1@188.722,176.288 R26.1@188.722,176.293 ; C56.1@190.119,170.697 C56.1@190.279,170.697 ; C6.2@193.277,133.358 C6.2@193.675,132.96 C6.2@193.286,132.571 ; C5.1@194.224,127.127 C5.1@194.907,127.127
  Top Layer w0.4: J1.8@176.424,160.676 v2@176.424,163.343
  Top Layer w0.5: R10.1@157.861,131.076 158.889,130.048 160.516,130.048 R8.2@161.544,131.076 ; R8.2@161.561,131.064 v2@162.814,131.064 ; R11.1@163.83,139.602 165.481,137.951 v1@165.481,136.525 ; R9.2@163.974,136.525 164.008,136.491 165.464,136.491 v1@165.481,136.474 ; v2(183.134,133.731) X1.2@185.079,133.731 ; 193.929,172.212 L5.1@195.734,172.212
  Top Layer w0.8: C55.1@187.669,170.533 186.464,170.533 v2(185.674,171.323) 185.674,173.24 R26.1@188.722,176.288 ; R7.2@189.975,137.287 192.532,137.287 ; C56.1@190.279,170.697 191.116,169.86 U6.1@192.399,169.86 192.399,170.682 193.929,172.212 195.834,174.117 198.174,174.117 v2(198.936,173.355) ; 193.277,136.542 192.532,137.287 ; J2.3@195.664,139.7 196.977,139.7 ; v2(198.882,141.605) 196.977,139.7 ; 192.532,137.287 194.564,137.287 196.977,139.7
  Top Layer w1: X1.2@185.153,133.805 187.366,133.805 C9.2@188.595,132.576 ; C55.1@187.833,170.697 C56.1@190.119,170.697 ; C9.2@188.595,132.571 C8.2@190.119,132.571 C7.2@191.643,132.571 C6.2@193.286,132.571 ; C6.2@193.277,133.358 R1.2@193.277,135.509 193.277,136.542 ; C6.2@193.675,132.96 194.827,132.96 195.58,132.207 195.58,127.8 C5.1@194.907,127.127
  Bottom Layer w0.5: v2(163.068,131.064) 163.068,134.112 165.43,136.474 v1@165.481,136.474 ; v1@165.481,136.525 172.91,136.525 175.704,133.731 v2(183.134,133.731)
  Bottom Layer w0.8: v2(176.445,163.364) 176.445,164.888 182.88,171.323 v2(185.674,171.323) ; v2(198.882,141.605) 198.909,141.632 198.909,173.328 v2(198.936,173.355)
  other v1: 165.487,136.473
3.3V_ADC: C33.1 C47.2 C48.2 E3.1 U2.6 U2.7 U2.23 U2.34 | length 30.3
  Top Layer w0.254: U2.34@138.677,167.956 U2.34@138.69,167.943 ; C33.1@143.268,162.179 C33.1@143.273,162.179 ; C48.2@143.268,165.481 C48.2@143.273,165.481 143.278,165.481 143.616,165.819 C48.2@143.616,165.824
  Top Layer w0.4: U2.6@134.177,156.616 U2.7@134.677,156.616 134.677,158.553 137.66,161.536 U2.23@141.097,161.536 142.625,161.536 C33.1@143.268,162.179 ; U2.34@138.69,167.943 138.69,166.999 139.065,166.624 142.125,166.624 C48.2@143.268,165.481
  Top Layer w0.5: C33.1@143.273,162.179 C47.2@143.273,163.83 C48.2@143.273,165.481 ; C48.2@143.616,165.824 147.639,169.847 E3.1@149.733,169.847
  other v2: 146.482,168.681
5V: C29.1 C30.1 C31.1 C32.1 C39.2 C40.2 C41.2 E4.1 U2.1 U2.37 U2.38 U2.48 | length 43.7
  Top Layer w0.127: 131.677,167.113 U2.48@131.677,167.956 ; U2.37@137.177,167.956 137.177,167.547 U2.37@137.185,167.538
  Top Layer w0.254: C31.1@130.34,171.175 130.345,171.175 130.683,170.837 C31.1@130.683,170.832 ; C40.2@130.556,176.669 C40.2@130.556,176.674 ; C32.1@131.589,153.924 C32.1@131.677,154.012 ; C39.2@134.247,176.674 C39.2@134.366,176.793 ; C29.1@136.677,170.73 C29.1@136.779,170.832 ; E4.1@136.836,176.793 E4.1@137.16,177.117
  Top Layer w0.4: C31.1@130.683,170.832 130.683,169.595 131.677,168.601 U2.48@131.677,167.956 ; C32.1@131.677,154.012 U2.1@131.677,156.616 131.677,166.366 ; 131.677,167.113 131.677,166.366 ; C29.1@136.677,170.73 U2.38@136.677,167.956 ; C29.1@136.779,170.832 C30.1@138.303,170.832 ; U2.37@137.177,167.956 U2.38@136.677,167.956 ; 131.677,166.366 132.105,165.938 135.992,165.938 136.677,166.624 U2.38@136.677,167.956
  Top Layer w0.5: C40.2@130.556,176.669 129.54,175.653 129.54,171.704 130.192,171.052 130.468,171.052 C31.1@130.683,170.837 ; C40.2@130.556,176.674 C41.2@132.334,176.674 C39.2@134.247,176.674 ; C39.2@134.366,176.793 E4.1@136.836,176.793
  other v2: 129.134,172.364
+5: C1.1 C2.2 C3.1 C38.1 C50.1 C57.2 C58.2 C60.1 C61.2 C62.2 C70.1 C72.1 C73.1 C74.1 E1.1 E4.2 J1.1 Q1.5 Q1.6 Q1.7 Q1.8 R20.1 U3.1 U3.3 U4.5 U6.2 U6.3 U8.8 U9.7 U10.7 | length 203.1
  Top Layer w0.127: C1.1@183.683,169.037 C1.1@184.248,169.037
  Top Layer w0.254: C74.1@121.526,148.306 C74.1@121.526,148.336 ; C70.1@121.526,150.114 C70.1@121.526,150.144 ; C72.1@126.325,188.822 126.352,188.849 C72.1@126.606,189.103 ; C73.1@135.496,144.653 C73.1@135.636,144.793 ; C38.1@144.234,180.007 144.907,180.68 C38.1@144.907,181.016 ; 153.797,189.374 153.979,189.192 R20.1@153.979,189.187 ; U3.3@156.901,175.956 U3.3@157.211,175.956 ; U3.1@156.906,174.056 U3.1@157.211,174.056 ; U4.5@159.467,189.357 U4.5@159.633,189.357 ; C58.2@173.6,187.063 C58.2@173.674,186.989 ; J1.1@179.903,160.655 J1.1@179.915,160.643 ; C1.1@182.983,169.037 C1.1@183.683,169.037 ; C1.1@184.248,169.037 C1.1@184.667,168.618 ; C3.1@184.421,159.385 C3.1@184.675,159.639 ; C62.2@189.602,165.854 C62.2@189.721,165.735 ; C60.1@190.648,162.687 C60.1@191.348,162.687
  Top Layer w0.3: U3.3@156.901,175.956 156.21,175.265 156.21,174.752 U3.1@156.906,174.056
  Top Layer w0.4: J1.1@179.915,160.643 179.953,160.605 179.953,159.899 180.082,159.77
  Top Layer w0.5: U10.7@124.239,188.849 C72.1@126.352,188.849 ; v2(130.556,183.134) v2@130.641,183.049 ; 157.816,187.706 U4.5@159.467,189.357 ; 180.082,159.77 180.467,159.385 ; C1.1@184.248,169.037 188.747,169.037 189.602,168.182 C61.2@189.602,167.64
  Top Layer w0.8: 180.467,159.385 C3.1@184.421,159.385 ; C3.1@184.667,159.647 C2.2@184.667,161.671 C1.1@184.667,168.618 ; U6.3@192.399,167.96 U6.2@192.399,168.91
  Top Layer w1: C74.1@121.526,148.306 120.392,147.172 U8.8@120.392,145.796 120.992,145.796 122.135,146.939 122.301,146.939 ; C74.1@121.526,148.336 C70.1@121.526,150.114 ; C70.1@121.526,150.144 119.428,152.242 E1.1@119.428,177.927 v2(121.535,177.927) ; C72.1@126.325,188.822 126.325,188.381 127.381,187.325 128.354,187.325 132.63,183.049 ; v2@130.641,183.049 132.63,183.049 ; U9.7@133.256,144.653 C73.1@135.496,144.653 ; C73.1@135.636,144.793 v2@135.636,146.558 ; C38.1@144.234,180.007 E4.2@137.16,180.007 135.672,180.007 132.63,183.049 ; C38.1@144.907,181.016 145.207,181.316 145.207,182.545 151.511,188.849 R20.1@154.317,188.849 ; 153.797,189.374 C50.1@153.797,190.89 ; R20.1@153.979,189.187 R20.1@154.317,188.849 ; R20.1@154.322,188.849 R20.1@154.317,188.849 ; 154.494,188.152 154.94,187.706 157.816,187.706 156.972,186.862 156.972,183.261 158.877,181.356 ; U3.3@157.211,175.956 157.211,179.69 158.877,181.356 ; C58.2@173.6,187.063 C57.2@173.6,188.976 ; C58.2@173.674,186.989 Q1.5@173.674,185.166 Q1.6@173.674,183.896 Q1.7@173.674,182.626 Q1.8@173.674,181.356 ; C1.1@182.983,169.037 182.31,169.71 182.31,171.129 173.674,179.764 Q1.8@173.674,181.356 ; C62.2@189.602,165.854 C61.2@189.602,167.64 ; C62.2@189.721,165.735 189.721,163.614 C60.1@190.648,162.687 ; C61.2@189.922,167.96 U6.3@192.399,167.96 ; 158.877,181.356 Q1.8@173.674,181.356
  Bottom Layer w1: v2(121.535,177.927) 125.349,177.927 v2(130.556,183.134) ; v2(122.936,146.812) v2(135.636,146.812)
  other v2: 177.927,175.514
ADC_49: C78.2 R33.2 U2.49 | length 11
  Top Layer w0.254: C78.2@123.331,158.531 C78.2@122.858,159.004 123.331,159.477 123.331,160.138 124.326,161.133 R33.2@124.326,161.163 124.634,161.471 124.634,161.716 128.941,166.023 129.744,166.023 U2.49@129.757,166.036
  other v2: 127.889,165.76
ADC_50: C78.1 R41.2 U2.50 | length 12.9
  Top Layer w0.254: R41.2@122.985,157.014 R41.2@122.816,156.845 122.816,156.875 124.162,158.221 125.335,158.221 125.808,158.694 C78.1@125.808,159.004 125.808,162.351 128.98,165.523 129.744,165.523 U2.50@129.757,165.536
  other v2: 125.832,160.909
ADC_57: C77.2 R36.2 U2.57 | length 9.6
  Top Layer w0.254: v1(126.111,164.084) 126.062,164.133 C77.2@126.062,165.608 126.111,165.657 R36.2@126.111,169.178 ; v1(127.508,162.687) 128.159,162.036 U2.57@129.757,162.036
  Bottom Layer w0.254: v1(126.111,164.084) v1(127.508,162.687)
ADC_58: C77.1 R38.2 U2.58 | length 13.2
  Top Layer w0.254: v1(123.952,163.957) 123.317,163.957 123.112,164.162 C77.1@123.112,165.608 123.112,168.084 123.868,168.84 123.868,168.87 124.176,169.178 R38.2@124.206,169.178 ; v1(127.508,161.671) 127.602,161.671 127.737,161.536 U2.58@129.757,161.536
  Bottom Layer w0.254: v1(123.952,163.957) 125.095,163.957 127.381,161.671 v1(127.508,161.671)
BOOT0: C26.2 R19.2 S2.3 U12.44 | length 10.1
  Top Layer w0.254: R19.2@151.621,139.573 C26.2@151.621,141.351 151.621,144.752 152.449,145.58 152.006,146.023 U12.44@152.006,149.18
CTP-INT: J1.13 X1.9 | length 30.6
  Top Layer w0.254: v2(171.577,156.337) 173.838,158.852 ccw(c173.649,159.022) 173.903,159.022 J1.13@173.903,160.655 ; v2@182.753,142.748 182.806,142.695 X1.9@185.153,142.695
  Bottom Layer w0.254: v2(171.577,156.337) 171.323,155.223 171.323,145.923 174.625,142.621 v2(182.499,142.621)
CTP-RST: J1.11 X1.23 | length 11.1
  Top Layer w0.254: X1.23@173.228,150.295 173.228,152.908 174.903,154.583 J1.11@174.903,160.655
CTP-SCL: J1.10 X1.11 | length 30.8
  Top Layer w0.254: v2(175.26,162.306) 175.38,162.186 175.38,160.678 J1.10@175.403,160.655 ; v2(179.705,145.161) 185.079,145.161 X1.11@185.153,145.235
  Bottom Layer w0.254: v2(175.26,162.306) 175.26,155.12 173.101,152.961 173.101,146.939 174.879,145.161 v2(179.705,145.161)
CTP-SDA: J1.12 X1.10 | length 28.9
  Top Layer w0.254: v2(172.352,155.175) 173.141,155.996 cw(c173.325,155.82) 173.144,155.999 174.403,157.258 J1.12@174.403,160.655 ; v2(181.102,143.891) 185.079,143.891 X1.10@185.153,143.965
  Bottom Layer w0.254: v2(172.352,155.175) 172.34,146.664 ccw(c172.594,146.662) 172.413,146.484 175.006,143.891 v2(181.102,143.891)
DN2: J6.A7 J6.B7 U1.3 | length 12.2
  Top Layer w0.254: U1.3@187.183,156.271 186.873,156.271 186.055,155.453 186.055,153.416 187.706,151.765 190.263,151.765 191.113,150.915 ; J6.B7@192.1,150.507 192.077,150.53 191.498,150.53 191.113,150.915 ; J6.A7@192.1,151.507 192.077,151.484 191.362,151.484 191.113,151.235 191.113,150.915
DP2: J6.A6 J6.B6 U1.1 | length 8.3
  Top Layer w0.254: U1.1@187.183,154.371 188.489,154.371 190.853,152.007 J6.B6@192.1,152.007 192.123,151.984 192.702,151.984 192.924,151.762 192.924,151.252 192.775,151.103 192.616,151.103 192.52,151.007 J6.A6@192.1,151.007
FB: C51.1 R22.2 R23.1 U4.9 | length 11.9
  Top Layer w0.127: R22.2@166.751,191.66 R22.2@166.793,191.618 ; C51.1@167.699,189.154 C51.1@167.894,188.959
  Top Layer w0.254: U4.9@162.433,190.857 165.953,190.857 166.751,191.655 R22.2@166.751,191.66 ; R23.1@165.989,187.469 165.989,187.474 167.131,188.616 167.429,188.616 167.767,188.954 C51.1@167.767,188.959
  Top Layer w0.3: R22.2@166.793,191.618 v1(167.716,191.618) ; v1(166.903,189.154) C51.1@167.699,189.154
  Bottom Layer w0.254: v1(166.903,189.154) 166.903,190.805 v1(167.716,191.618)